# EAGLE board Adafruit LSM9DS1 (EAGLE 6.6.0)
REV: A
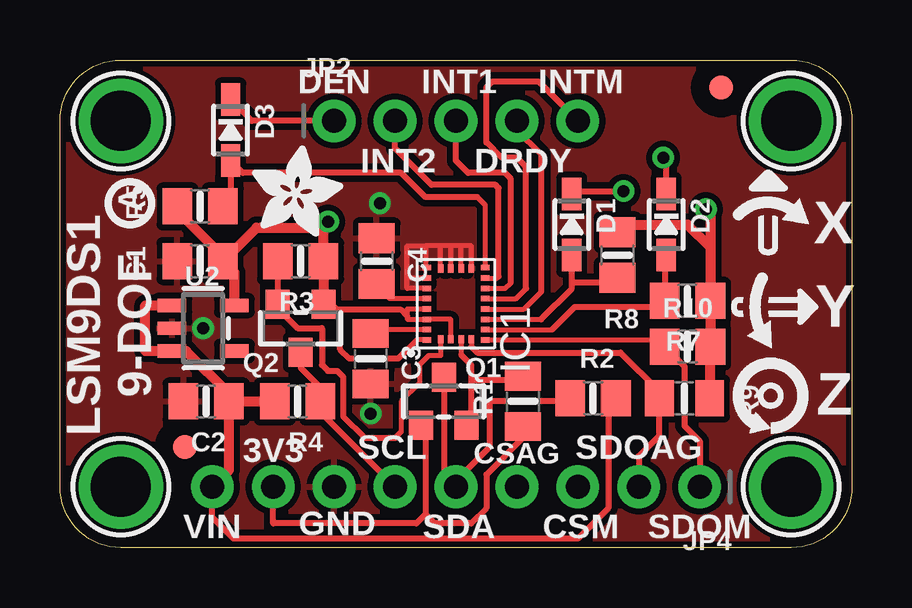
[diagram p0: board, top side]
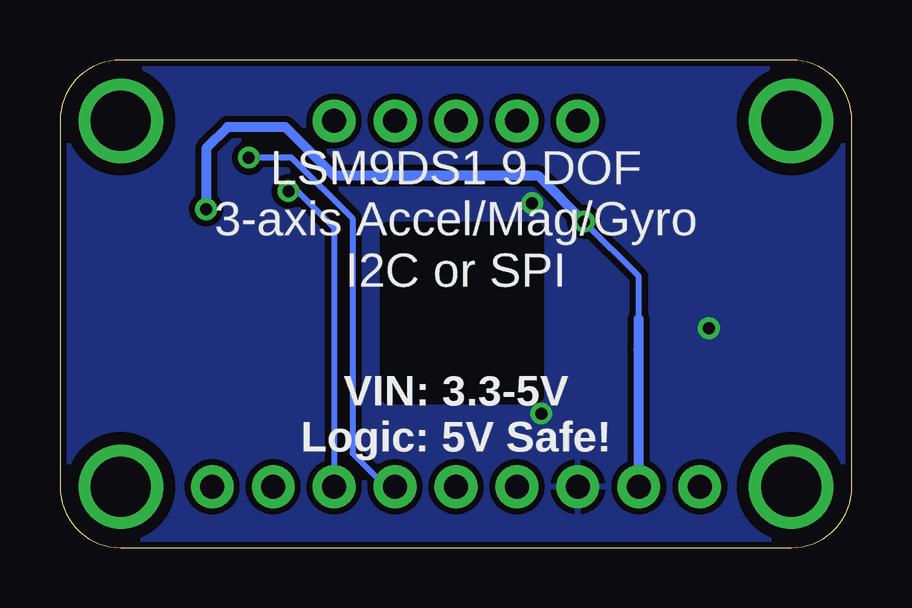
[diagram p1: board, bottom side, seen from below]

Size 33.02 x 20.32 mm. Coordinates in mm from the lower left corner, seen from the top.
Outline: 0,2.54 0,17.78 arc-90 2.54,20.32 30.48,20.32 arc-90 33.02,17.78 33.02,2.54 arc-90 30.48,0 2.54,0 arc-90 0,2.54
Copper layers (1*16): Top 0.035mm / dielectric 1.5mm / Bottom 0.035mm
Design rules "adafruit *": minimum track width 8mil, minimum drill 15.5mil, track to track 7mil, track to pad 7mil, pad to pad 7mil, via to via 7mil, smd to smd 7mil, copper to edge 10mil, drill to drill 8mil, minimum pad ring 10mil, minimum via ring 8mil, stop-mask expansion 2mil, vias tented up to drill 20mil, thermal gap 10mil
tRestrict: area 15.6,11.5 to 15.7,11.8; area 16,11.5 to 16.1,11.8; area 16.5,11.5 to 16.6,11.8; area 16.9,11.5 to 17,11.8; area 15.2,11 to 15.5,11.1
bRestrict: area 13.2,6.3 to 19.3,13.2

## Footprints (pad centres in the part's own frame; a part is rotated, then mirrored left to right if it is on the bottom)
0805-NO = smd 1.24 x 1.5: 1 -0.95,0; 2 0.95,0
0805_10MGAP = smd 1.2 x 1.5: 1 -1.05,0; 2 1.05,0
SOD-323 = smd 1.35 x 0.8: A 1.27,0; C -1.27,0
FIDUCIAL_1MM = smd 1 x 1: 1 0,0
LGA24_3.5X3.1MM = smd 0.23 x 0.35: 1 -1.505,1.22; 6 -1.505,-1.22; 7 -1.075,-1.22; 8 -0.645,-1.22; 9 -0.215,-1.22; 10 0.215,-1.22; 11 0.645,-1.22; 12 1.075,-1.22; 13 1.505,-1.22; 18 1.505,1.22; 19 1.075,1.22; 20 0.645,1.22; 21 0.215,1.22; 22 -0.215,1.22; 23 -0.645,1.22; 24 -1.075,1.22 | smd 0.35 x 0.23: 2 -1.475,0.645; 3 -1.475,0.215; 4 -1.475,-0.215; 5 -1.475,-0.645; 14 1.475,-0.645; 15 1.475,-0.215; 16 1.475,0.215; 17 1.475,0.645
1X05_ROUND_70 = drill 1 pad 1.778: 1 -5.08,0; 2 -2.54,0; 3 0,0; 4 2.54,0; 5 5.08,0
1X09_ROUND_70 = drill 1 pad 1.778: 1 -10.16,0; 2 -7.62,0; 3 -5.08,0; 4 -2.54,0; 5 0,0; 6 2.54,0; 7 5.08,0; 8 7.62,0; 9 10.16,0
SOT23-WIDE = smd 1 x 1.2: 1 -0.95,-1; 2 0.95,-1; 3 0,1
SOT23-5 = smd 0.55 x 1.2: 1 -0.95,-1.3; 2 0,-1.3; 3 0.95,-1.3; 4 0.95,1.3; 5 -0.95,1.3
MOUNTINGHOLE_2.5_PLATED = drill 2.5 pad 3.2: P$1 0,0

## Placement (x,y rotation side)
C1  10µF  [0805-NO]  5.84,11.94 180 top
C2  10µF  [0805-NO]  6.1,6.1 180 top
C3  0.22uF  [0805_10MGAP]  12.95,7.87 270 top
C4  10uF  [0805-NO]  13.21,11.94 90 top
D1  1N4148  [SOD-323]  21.34,13.46 270 top
D2  1N4148  [SOD-323]  25.27,13.46 270 top
D3  1N4148  [SOD-323]  7.11,17.4 270 top
FID1  FIDUCIAL""  [FIDUCIAL_1MM]  5.21,4.19 0 top
FID3  FIDUCIAL""  [FIDUCIAL_1MM]  27.56,19.18 0 top
IC1  LSM9DS1  [LGA24_3.5X3.1MM]  16.51,10.16 90 top
JP2  [1X05_ROUND_70]  16.51,17.78 0 top
JP4  PowerIO  [1X09_ROUND_70]  16.51,2.54 180 top
Q1  BSS138  [SOT23-WIDE]  16,6.1 0 top
Q2  BSS138  [SOT23-WIDE]  10.03,9.14 180 top
R1  10K  [0805_10MGAP]  19.3,6.1 270 top
R2  10K  [0805-NO]  22.23,6.22 0 top
R3  10K  [0805-NO]  10.03,11.94 0 top
R4  10K  [0805-NO]  9.91,6.1 180 top
R5  10K  [0805-NO]  5.84,14.22 180 top
R7  10K  [0805-NO]  26.16,10.29 180 top
R8  10K  [0805-NO]  23.24,12.19 270 top
R9  10K  [0805_10MGAP]  26.04,6.22 180 top
R10  10K  [0805-NO]  26.16,8.38 180 top
U2  MIC5225-3.3  [SOT23-5]  5.97,9.14 270 top
U$4  MOUNTINGHOLE2.5  [MOUNTINGHOLE_2.5_PLATED]  2.54,2.54 0 top
U$5  MOUNTINGHOLE2.5  [MOUNTINGHOLE_2.5_PLATED]  30.48,2.54 0 top
U$6  MOUNTINGHOLE2.5  [MOUNTINGHOLE_2.5_PLATED]  30.48,17.78 0 top
U$7  MOUNTINGHOLE2.5  [MOUNTINGHOLE_2.5_PLATED]  2.54,17.78 0 top
U$14  [SYMBOL_GYROXYZ_YREV_10MM]  27.94,14.99 270 top
U$20  [PCBFEAT-REV-040]  2.92,14.35 90 top
U$23  [ADAFRUIT_3.5MM]  8,12.95 0 top

## Library data of the parts
C1-C4 D1 D2 IC1 JP2 JP4 Q1 Q2 R1-R5 R7-R10 U2 U$14 U$20 U$23 = microbuilder
D3 = microbuilder; COMPANY: ADAFRUIT INDUSTRIES; DRAWN: KTOWN; REV: A
FID1 U$4-U$7 = microbuilder; BOM: EXCLUDE
FID3 = microbuilder; BOM: EXCLUDE; COMPANY: ADAFRUIT INDUSTRIES; DRAWN: KTOWN; REV: B

## Nets
C1: C3.1 IC1.24
CAP: C4.1 IC1.21
CS_A/G: D2.A IC1.7 R7.2
CS_AG_5V: D2.C JP4.4
CS_M: D1.A IC1.8 R8.2
CS_M_5V: D1.C JP4.3
DEN_3V: D3.A IC1.13 R5.1
DEN_5V: D3.C JP2.1
DRDY_M: IC1.9 JP2.4
GND: C1.2 C2.2 C3.2 C4.2 IC1.14 IC1.15 IC1.16 IC1.17 IC1.18 IC1.19 IC1.20 JP4.7 U2.2
INT1_AG: IC1.11 JP2.3
INT2_AG: IC1.12 JP2.2
INT_M: IC1.10 JP2.5
SCL_3V: IC1.2 Q2.2 R3.1
SCL_5V: JP4.6 Q2.3 R4.1
SDA_3V: IC1.4 Q1.2 R1.1
SDA_5V: JP4.5 Q1.3 R2.1
SDO_AG: IC1.5 JP4.2 R9.2
SDO_M: IC1.6 JP4.1 R10.2
VDD: C1.1 IC1.1 IC1.3 IC1.22 IC1.23 JP4.8 Q1.1 Q2.1 R1.2 R3.2 R5.2 R7.1 R8.1 R9.1 R10.1 U2.5
VIN: C2.1 JP4.9 R2.2 R4.2 U2.1 U2.3

## Tracks (layer width: path | path; a pad name or v marks a point on that pad's centre or on a via)
C1
  Top 0.203: IC1.24 13.46,9.09
  Top 0.254: 13.46,9.09 13.29,8.92 C3.1
CAP
  Top 0.203: IC1.21 13.76,10.38 13.59,10.54
  Top 0.254: 13.59,10.54 13.14,10.99 C4.1
CS_A/G
  Top 0.203: IC1.7 20.52,9.09
  Top 0.254: D2.A 25.21,12.13 R7.2 24.96,10.29 24.7,10.03 21.46,10.03 20.52,9.09
CS_AG_5V  (via drill 0.5)
  Top 0.254: D2.C 25.27,16.13 v25.15,16.26
  Bottom 0.254: 25.27,16.26 v25.15,16.26 23.37,16.26 20.83,13.72 20.83,3.94 19.43,2.54 JP4.4
CS_M
  Top 0.203: IC1.8 20.06,9.52
  Top 0.254: 20.06,9.52 21.34,10.79 21.34,11.05 | 21.34,11.05 D1.A | R8.2 23.05,11.05 21.34,11.05
CS_M_5V  (via drill 0.5)
  Top 0.254: D1.C 21.46,14.86 v23.5,14.86
  Bottom 0.254: JP4.3 21.59,13.34 23.11,14.86 v23.5,14.86
DEN_3V
  Top 0.203: IC1.13 17.73,14.27 17.4,14.61
  Top 0.254: R5.1 7.11,14.54 D3.A 7.62,15.62 14.22,15.62 15.24,14.61 17.4,14.61
DEN_5V
  Top 0.254: JP2.1 8,17.78 D3.C
DRDY_M
  Top 0.203: IC1.9 19.34,9.95 20.07,10.67
  Top 0.254: 20.07,10.67 20.07,16.38 19.05,17.4 JP2.4
GND  (via drill 0.5)
  Top 0.203: IC1.14 17.16,12.57 16.73,12.57 | 16.73,12.57 16.3,12.57 | 16.3,12.57 15.87,12.57 | 15.87,12.57 15.24,12.57 | 15.24,12.57 15.24,11.66 IC1.18 | IC1.17 15.87,12.57 | IC1.16 16.3,12.57 | IC1.15 16.73,12.57 | IC1.20 14.48,10.8 14.48,11.23 | 14.48,11.23 14.48,12.57 15.24,12.57 | IC1.19 14.48,11.23
  other vias: 13.34,14.35 12.95,5.59 5.97,9.14
  pour Bottom (isolate 0.254): 0,0 0,20.32 33.02,20.32 33.02,0
  pour Top (isolate 0.254): 0,20.32 33.02,20.32 33.02,0 0,0
INT1_AG
  Top 0.203: IC1.11 18.55,10.8 18.8,11.05
  Top 0.254: 18.8,11.05 18.8,15.37 18.54,15.62 17.02,15.62 16.51,16.13 JP2.3
INT2_AG
  Top 0.203: IC1.12 18.22,11.23 18.29,11.3
  Top 0.254: 18.29,11.3 18.29,14.99 18.16,15.11 15.49,15.11 13.97,16.64 JP2.2
INT_M
  Top 0.203: IC1.10 19.01,10.38 19.43,10.79
  Top 0.254: 19.43,10.79 19.43,15.88 19.05,16.26 18.41,16.26 17.78,16.89 17.78,19.18 18.03,19.43 19.94,19.43 JP2.5
SCL_3V
  Top 0.203: IC1.2 15.87,8 15.37,8 14.99,7.62 14.99,6.86 14.22,6.1 14.22,4.83 13.97,4.57
  Top 0.254: R3.1 Q2.2 9.08,9.97 9.91,9.14 10.92,9.14 10.92,7.62 11.18,7.37 11.56,7.37 11.81,7.11 11.81,5.46 12.7,4.57 13.97,4.57
SCL_5V
  Top 0.254: JP4.6 11.05,5.46 11.05,5.9 R4.1 10.79,6.16 10.79,6.73 10.03,7.49 Q2.3
SDA_3V
  Top 0.203: IC1.4 16.73,8.04
  Top 0.254: 16.73,8.04 17.14,7.62 17.14,6.99 | 17.14,6.99 17.14,5.29 Q1.2 | 17.14,6.99 19.08,6.99 19.25,7.15 R1.1
SDA_5V
  Top 0.254: Q1.3 16,3.05 JP4.5 16.51,2.79 17.91,4.19 17.91,6.1 21.15,6.1 R2.1
SDO_AG
  Top 0.203: IC1.5 17.16,8.37
  Top 0.254: 17.16,8.37 17.4,8.13 23.37,8.13 24.98,6.51 R9.2 24.98,4.67 24.13,3.81 JP4.2
SDO_M
  Top 0.203: IC1.6 24.94,8.65
  Top 0.254: 24.94,8.65 R10.2 26.04,7.56 26.04,5.08 26.67,4.45 JP4.1
VDD  (via drill 0.5)
  Top 0.203: IC1.22 14.48,9.95 14.48,9.65 14.48,9.53 IC1.23 16.3,9.52 IC1.3 | IC1.1 14.88,8.65 14.48,8.26
  Top 0.254: R8.1 23.56,13.46 | 10.98,13.4 v11.18,13.59 | 14.48,9.65 14.22,9.91 11.68,9.91 | 11.68,9.91 11.56,9.91 11.32,10.14 Q2.1 | 14.48,8.26 14.1,7.87 12.06,7.87 11.68,8.26 11.68,9.91 | Q1.1 15.24,4.91 15.24,1.4 | 15.24,1.4 14.86,1.02 8.89,1.02 JP4.8 | 15.24,1.4 15.62,1.02 17.14,1.02 17.78,1.65 17.78,3.05 19.3,4.57 R1.2 | R10.1 27.09,8.36
  Top 0.406: R5.2 4.89,14.03 6.79,12.13 C1.1 | 23.56,13.46 26.16,13.46 27.11,12.51 | 27.11,12.51 R7.1 R10.1 | Q2.1 R3.2 10.98,13.4 | v11.18,13.59 10.92,13.34 8.38,13.34 8.19,13.34 C1.1 | v26.92,14.1 27.11,13.91 27.11,12.51 | 27.09,8.36 R9.1 | C1.1 7.27,11.46 U2.5
  Bottom 0.203: 9.02,8.26 8.89,8.13
  Bottom 0.254: 8.89,9.53 8.89,11.3 v11.18,13.59
  Bottom 0.406: JP4.8 8.89,8.13 8.89,9.53 | v11.18,13.59 13.08,15.49 21.59,15.49 23.62,17.53 26.04,17.53 26.92,16.64 v26.92,14.1
VIN
  Top 0.254: JP4.9 6.35,1.27 7.24,0.38 21.59,0.38 22.86,1.65 22.86,5.9 R2.2
  Top 0.406: U2.1 3.56,10.09 3.56,8.19 U2.3 5.27,8.19 7.05,6.42 C2.1 | JP4.9 7.05,3.24 C2.1 | C2.1 R4.2

## Text on the board
tPlace: DEN | INT1 | INTM | INT2 | DRDY | X | Y | LSM9DS1 / 9-DOF | Z | 3V3 | SCL | CSAG | SDOAG | VIN | GND | SDA | CSM | SDOM
bPlace: LSM9DS1 9 DOF / 3-axis Accel/Mag/Gyro / I2C or SPI | VIN: 3.3-5V / Logic: 5V Safe!